# EAGLE board proto2board_lay (EAGLE 9.6.2)
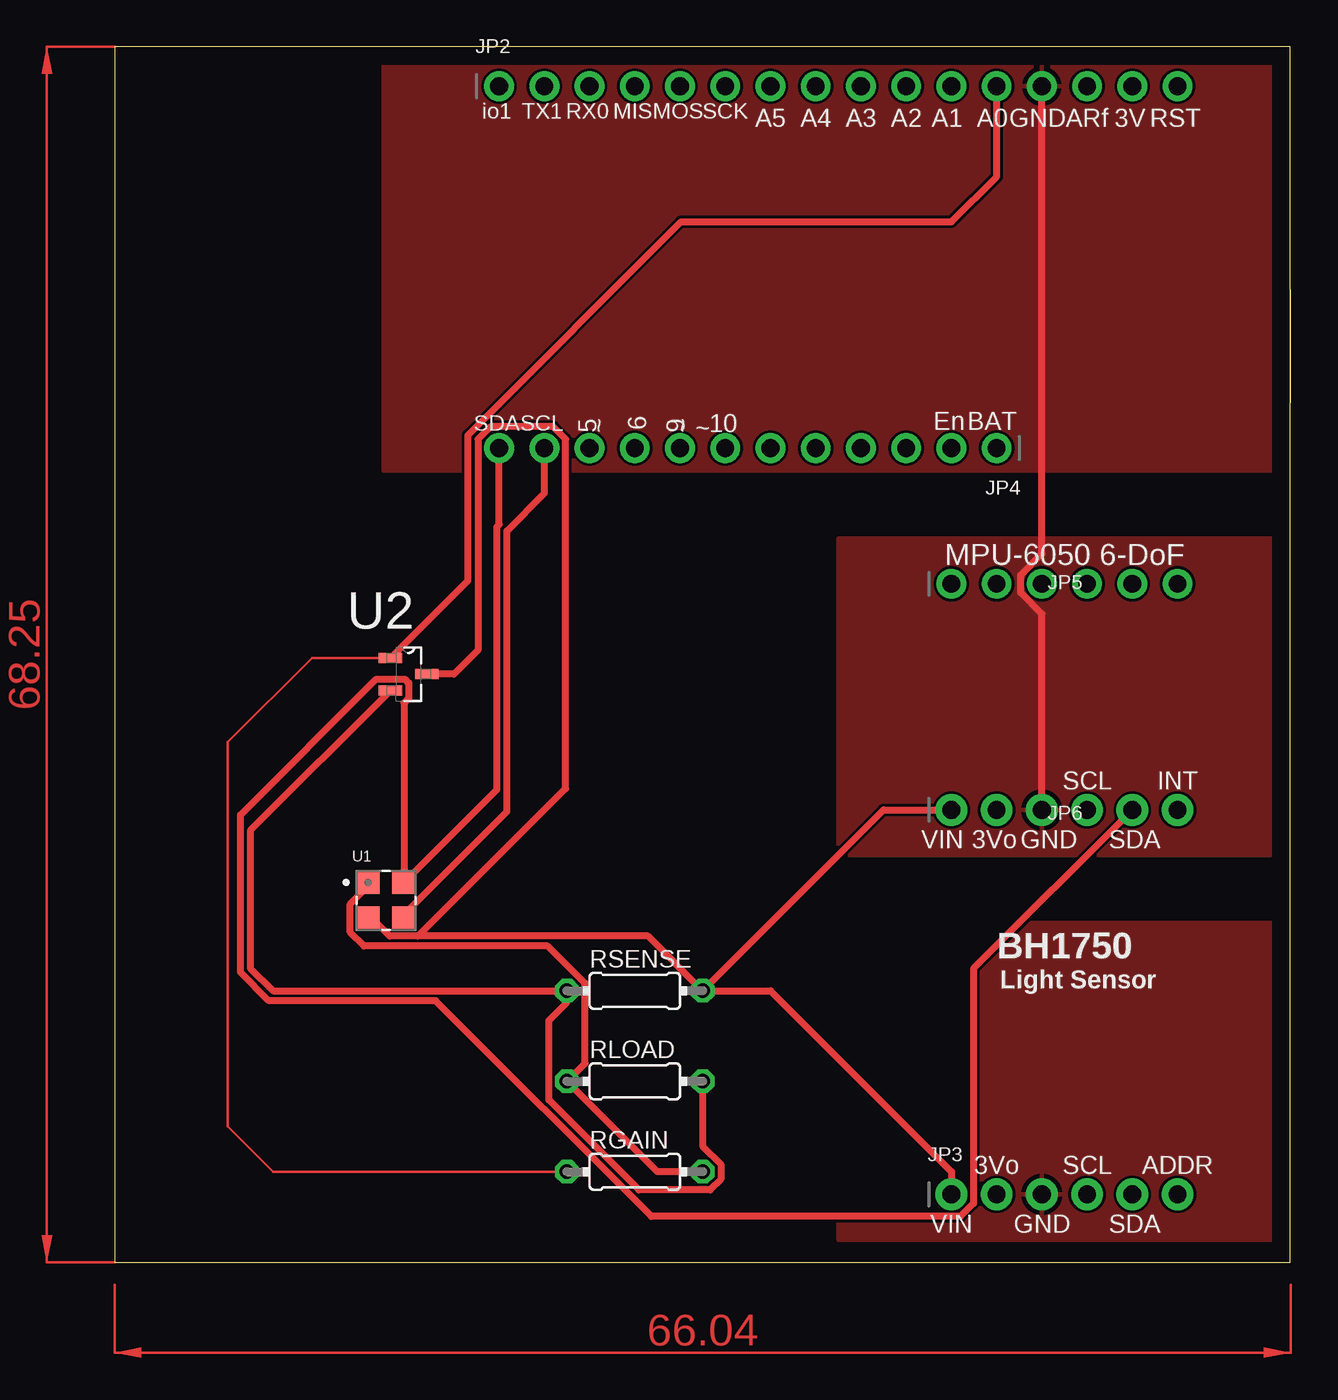
[diagram p0: board, top side]
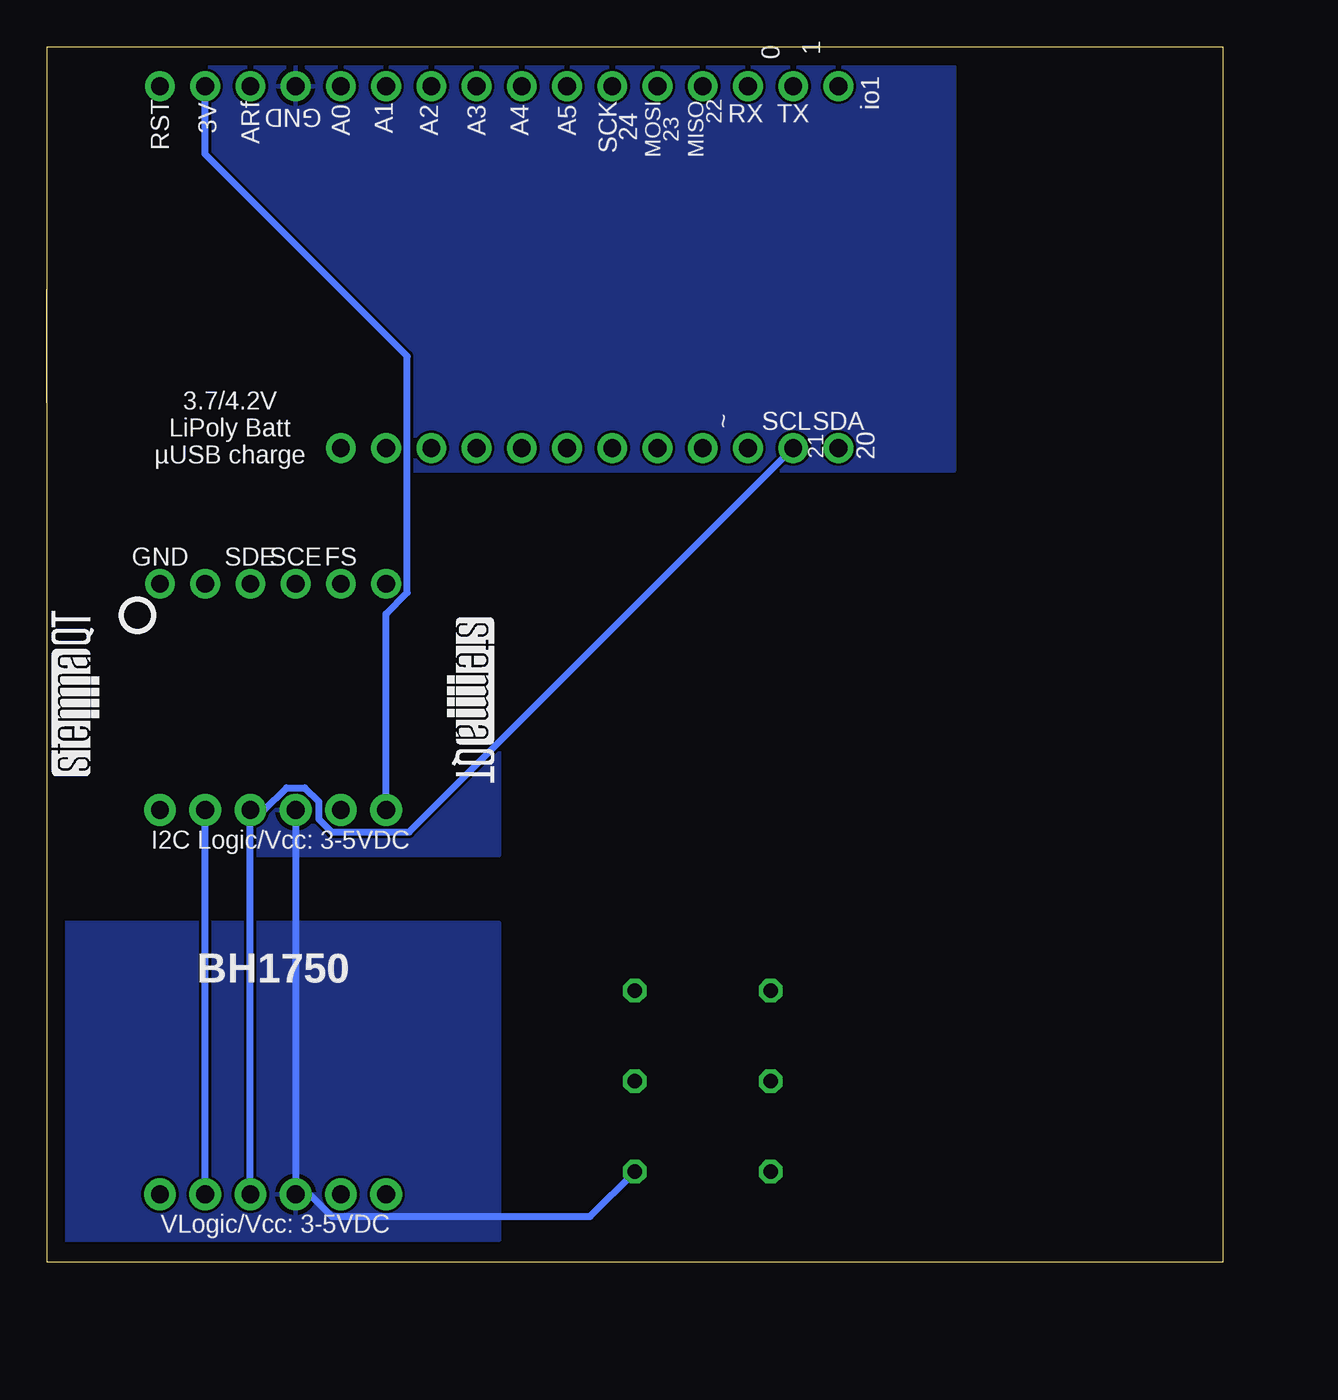
[diagram p1: board, bottom side, seen from below]

Size 66.04 x 68.25 mm. Coordinates in mm from the lower left corner, seen from the top.
Outline: 66.04,48.26 66.04,54.61
Outline: 0,0 66.02,0 66.02,68.25 0,68.25 0,0
Copper layers (1*16): Top 0.035mm / dielectric 1.5mm / Bottom 0.035mm
Design rules "default": minimum track width 6mil, minimum drill 0.35mm, track to track 6mil, track to pad 6mil, pad to pad 6mil, via to via 6mil, smd to smd 6mil, copper to edge 40mil, drill to drill 6mil, minimum pad ring 10mil, minimum via ring 8mil, stop-mask expansion 4mil, vias tented up to drill 0mil, thermal gap 10mil
Net classes: 1 highpower: width 0.406 mm, drill 0.483 mm; 2 lowpower: width 0.305 mm, drill 0.483 mm

## Footprints (pad centres in the part's own frame; a part is rotated, then mirrored left to right if it is on the bottom)
1X16_ROUND = drill 1 pad 1.676: 1 -19.05,0; 2 -16.51,0; 3 -13.97,0; 4 -11.43,0; 5 -8.89,0; 6 -6.35,0; 7 -3.81,0; 8 -1.27,0; 9 1.27,0; 10 3.81,0; 11 6.35,0; 12 8.89,0; 13 11.43,0; 14 13.97,0; 15 16.51,0; 16 19.05,0
1X06_ROUND_70 = drill 1 pad 1.778: 1 -6.35,0; 2 -3.81,0; 3 -1.27,0; 4 1.27,0; 5 3.81,0; 6 6.35,0
1X12_ROUND = drill 1 pad 1.676: 1 -13.97,0; 2 -11.43,0; 3 -8.89,0; 4 -6.35,0; 5 -3.81,0; 6 -1.27,0; 7 1.27,0; 8 3.81,0; 9 6.35,0; 10 8.89,0; 11 11.43,0; 12 13.97,0
1X06_ROUND = drill 1 pad 1.676: 1 -6.35,0; 2 -3.81,0; 3 -1.27,0; 4 1.27,0; 5 3.81,0; 6 6.35,0
0204/7 = drill 0.813 octagon: 1 -3.81,0; 2 3.81,0
TE_MS583730BA01-50 = smd 1.3 x 1.3: 1 -1,1; 2 -1,-1; 3 1,-1; 4 1,1
SOT91P240X110-3N = smd 1.321 x 0.559: 1 -1.016,0.914; 2 -1.016,-0.914; 3 1.016,0

## Placement (x,y rotation side)
JP2  [1X16_ROUND]  40.64,66.04 0 top
JP3  [1X06_ROUND_70]  53.34,3.81 0 top
JP4  [1X12_ROUND]  35.56,45.72 180 top
JP5  [1X06_ROUND]  53.34,38.1 0 top
JP6  [1X06_ROUND_70]  53.34,25.4 0 top
RGAIN  [0204/7]  29.21,5.08 0 top
RLOAD  [0204/7]  29.21,10.16 0 top
RSENSE  [0204/7]  29.21,15.24 0 top
U1  MS583730BA01-50  [TE_MS583730BA01-50]  15.24,20.32 0 top
U2  ZXCT1107SA-7  [SOT91P240X110-3N]  16.51,33.02 0 top
U$6  [PCBFEAT-REV-040]  60.96,36.32 0 bottom
U$7  [STEMMAQT]  63.12,27.3 90 bottom
U$8  [STEMMAQT]  43.56,36.19 270 bottom

## Library data of the parts
JP2-JP6 U$6 = microbuilder
RGAIN RLOAD RSENSE = rcl; SPICEPREFIX: R
U1 = MS583730BA01-50; COMMENT: MS583730BA01-50; DESCRIPTION: Waterproof Digital Pressure Ms583730ba01-50; DIGI-KEY_PART_NUMBER: 223-1704-1-ND; MF: TE Connectivity; MP: MS583730BA01-50; PACKAGE: SMD-4 TE Connectivity ALCOSWITCH Switches; PURCHASE-URL: https://pricing.snapeda.com/search/part/MS583730BA01-50/?ref=eda
U2 = ZXCT1107SA-7; AVAILABILITY: In Stock; DESCRIPTION: Current Monitor Regulator High-Side - SOT-23-3; MF: Diodes Inc.; MP: ZXCT1107SA-7; PACKAGE: SOT-23-3 Diodes Inc.; PRICE: None; PURCHASE-URL: https://pricing.snapeda.com/search/part/ZXCT1107SA-7/?ref=eda
U$7 U$8 = silks

## Nets
!RESET: JP2.16
A0: JP2.12 RGAIN.1 U2.1
A1: JP2.11
A2: JP2.10
A3: JP2.9
A4: JP2.8
A5: JP2.7
AREF: JP2.14
D0: JP2.3
D1: JP2.2
D5: JP4.10
D6: JP4.9
D9: JP4.8
D10: JP4.7
D11: JP4.6
D12: JP4.5
D13: JP4.4
DIO1: JP2.1
EN: JP4.2
GND [highpower]: JP2.13 JP3.3 JP6.3 RGAIN.2 RLOAD.1 U1.1
MISO: JP2.4
MOSI: JP2.5
N$2: RLOAD.2 RSENSE.1 U2.2
SCK: JP2.6
SCL: JP3.4 JP4.11 JP6.4 U1.3
SDA: JP3.5 JP4.12 JP6.5 U1.4
VBAT: JP4.1
VBUS: JP4.3
VCC [highpower]: JP2.15 JP3.1 JP6.1 RSENSE.2 U1.2 U2.3

## Tracks (layer width: path | path; a pad name or v marks a point on that pad's centre or on a via)
A0
  Top 0.152: U2.1 11.07,33.93 6.35,29.21 6.35,7.62 8.89,5.08 RGAIN.1
  Top 0.406: U2.1 19.84,38.28 19.84,46.45 31.81,58.42 46.99,58.42 49.53,60.96 JP2.12
GND
  Top 0.406: JP6.3 52.07,36.41 50.88,37.61 50.88,38.59 52.07,39.79 JP2.13 | RGAIN.2 30.48,5.08 RLOAD.1 26.42,11.18 26.42,15.66 24.32,17.76 14,17.76 13.23,18.52 13.23,20.12 14.24,21.12 U1.1
  Bottom 0.406: JP6.3 JP3.3 51.29,3.81 50.05,2.56 35.53,2.56 RGAIN.2
  pour Top: 66.04,44.45 66.04,67.31 15.11,67.31 15.11,44.45
  pour Bottom: 15.11,67.31 66.04,67.31 66.04,44.45 15.11,44.45
  pour Top: 40.64,40.64 66.04,40.64 66.04,22.86 40.64,22.86
  pour Bottom: 40.64,40.64 66.04,40.64 66.04,22.86 40.64,22.86
  pour Top: 40.64,19.05 66.04,19.05 66.04,1.27 40.64,1.27
  pour Bottom: 40.64,19.05 66.04,19.05 66.04,1.27 40.64,1.27
N$2
  Top 0.406: U2.2 7.62,24.23 7.62,16.51 8.89,15.24 RSENSE.1 25.4,14.59 24.38,13.58 24.38,9.12 29.44,4.06 33.44,4.06 34.04,4.66 34.04,5.5 33.02,6.52 RLOAD.2
SCL
  Top 0.406: U1.3 16.24,19.52 22.02,25.3 22.02,41.07 24.13,43.18 JP4.11
  Bottom 0.406: JP3.4 JP6.4 53.83,25.4 52.59,26.65 51.55,26.65 50.77,25.87 50.77,24.88 50.05,24.16 45.7,24.16 34.29,35.56 JP4.11
SDA
  Top 0.406: JP6.5 48.23,16.48 48.23,3.29 47.51,2.56 30.14,2.56 18.03,14.68 8.66,14.68 7.06,16.28 7.06,25.12 14.69,32.74 16.3,32.74 16.51,32.53 16.51,31.68 16.24,31.41 U1.4 21.46,26.54 21.46,41.3 21.59,41.43 JP4.12
  Bottom 0.406: JP3.5 JP6.5
VCC
  Top 0.406: U1.2 14.44,19.32 15.44,18.31 17.04,18.31 | 17.04,18.31 25.32,26.6 25.32,46.21 24.62,46.91 21.1,46.91 20.4,46.21 20.4,34.37 19.05,33.02 U2.3 | RSENSE.2 36.83,15.24 46.99,5.08 JP3.1 | RSENSE.2 29.95,18.31 17.04,18.31 | RSENSE.2 43.18,25.4 JP6.1
  Bottom 0.406: JP6.1 46.99,36.41 45.8,37.61 45.8,50.88 57.15,62.23 JP2.15
(copper drawn outside any net)
  shapes: Top area x2

## Text on the board
tPlace: io1 | TX1 | RX0 | MIS | MOS | SCK | A5 | A4 | A3 | A2 | A1 | A0 | GND | ARf | 3V | RST | SDA | SCL | 5 | ~ | 6 | 9 | ~ | ~ | 10 | En | BAT | MPU-6050 6-DoF | SCL | INT | VIN | 3Vo | GND | SDA | BH1750 | Light Sensor | 3Vo | SCL | ADDR | VIN | GND | SDA
bPlace: 1 | 0 | io1 | TX | RX | 22 | 24 | SCK | A5 | A4 | A3 | A2 | A1 | A0 | GND | ARf | 3V | RST | MISO | 23 | MOSI | SDA | SCL | ~ | 3.7/4.2V / LiPoly Batt / µUSB charge | 20 | 21 | FS | SCE | SDE | GND | I2C Logic/Vcc: 3-5VDC | BH1750 | VLogic/Vcc: 3-5VDC